# Altium PCB ESP32_USB-C.PcbDoc (part 3 of 3)
Units mil, origin at the board's own origin, x right, y up, seen from the top; angles counter-clockwise.
Board outline 2697 x 1000 mil, 4 copper layers (L1, L2, L3, L4), stack 61.583 mil thick; 64 components, 73 nets, 299 pads, 171 vias.
Unrouted connection lines stored in the file: 5.
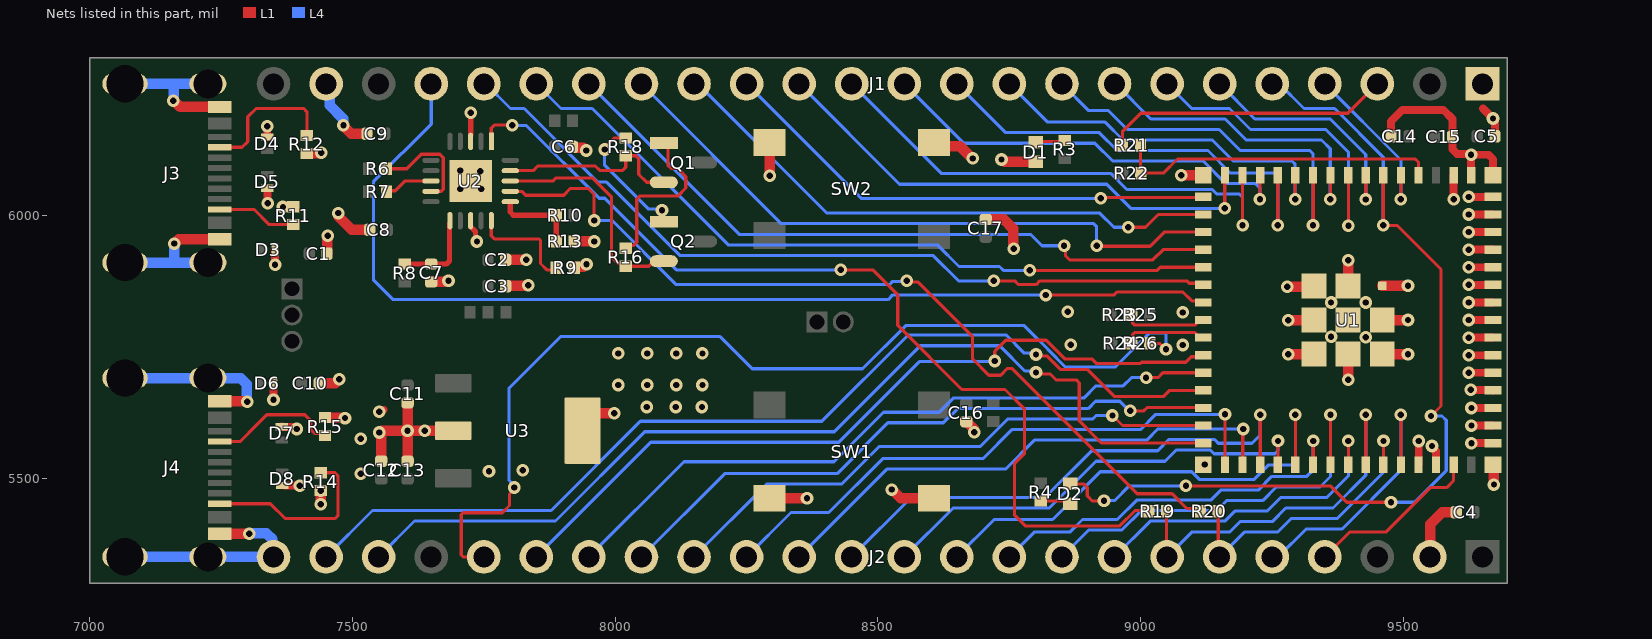
[diagram p4: the nets of this part, all layers, seen from the top]

## Via types
v1: diameter 24, hole 12, L1 to L4, tented both sides, 170 vias
v2: diameter 24, hole 12, L1 to L4, 1 vias

## Nets (pads, with @x,y where several pads share a name; then routed paths per layer and width w, separated by ;. In a path a pad name is that pad's centre, name@x,y a point inside that pad or via, vN(x,y) a via of type N, cw(c..) or ccw(c..) an arc to the next point about the centre after c; other vN are vias at no path point) (continued)
CON_ESP_USB_P: J2.20 R26.1 | length 1926.1
  L1 w6.03: J2.20@7750,5350 7710.55,5350 7707.02,5353.53 7707.02,5430.47 7710.55,5434 7785.25,5434 7799.02,5447.77 7799.02,5469.48 7808,5478.46 v1(7808,5482) ; R26.1@9017,5756 9036.17,5756 9046.98,5745.19 v1(9048,5745.19)
  L4 w6.03: v1(7808,5482) 7808,5485.53 7798.03,5495.5 7798.03,5671.03 7896,5769 8199.69,5769 8260.69,5708 8470.62,5708 8552.59,5789.97 8778.2,5789.97 8823.65,5744.53 8823.65,5744.09 8856.54,5711.2 8951.46,5711.2 9016.75,5776.48 9044.47,5776.48 9048,5772.95 v1(9048,5745.19)
CON_GPIO0: J1.3 R21.1 | length 548.6
  L1 w6: R21.1@8965.44,6133 8965.44,6159.56 8999.84,6193.97 9393.97,6193.97 J1.3@9450,6250
DTR_FTDI: Q2.2 R16.1 U2.18 | length 435.3
  L1 w6: U2.18@7800.41,6065 7800.5,6064.91 7825,6064.91 7881.27,6064.91 7887.36,6071 7956.69,6071 7993.19,6034.5 7993.19,5920.16 8004.73,5908.62 8014.37,5908.62 R16.1@8020,5902.99 8064.13,5902.99 8073.73,5912.6 Q2.2@8092.58,5912.6
ESP_USB_N: R23.2 R25.2 U1.23 | length 160.2
  L1 w6.03: R23.2@8977,5811 8984.61,5803.39 8984.61,5794.46 8988.21,5790.87 9102.55,5790.87 9106.09,5794.41 9106.09,5795.73 9110.95,5800.59 U1.23@9118.82,5800.59
ESP_USB_P: R24.2 R26.2 U1.24 | length 160.1
  L1 w6.03: R24.2@8979.01,5756 8984.61,5761.61 8984.61,5773.31 8988.15,5776.84 9102.55,5776.84 9106.09,5773.31 9106.09,5771.98 9110.95,5767.13 U1.24@9118.82,5767.13
FTDI_RESET: C7.2 R8.2 U2.11 | length 158.6
  L1 w10.01: R8.2@7600,5907.01 C7.2@7650,5907 7679.12,5907 7684.98,5912.86 7684.98,5970 U2.11@7684.98,5984.02
FTDI_USB_N: R6.2 U2.9 | length 207.6
  L1 w6.23: R6.2@7565.24,6088.58 7603.39,6088.58 7631,6116.2 7666.24,6116.2 7673.17,6109.27 7673.17,6048.96 7669.52,6045.31 U2.9@7649.59,6045.31
FTDI_USB_P: R7.2 U2.8 | length 92.9
  L1 w6.23: R7.2@7565.24,6044.29 7567.58,6046.64 7581.56,6046.64 7599.93,6065 7640,6065 U2.8@7649.59,6065
GND: C1.1 C2.1 C3.1 C4.1 C5.1 C6.1 C7.1 C8.1 C9.1 C10.1 C11.1 C12.1 C13.1 C14.1 C15.1 C16.1 C17.1 D1.1 D3.1 D4.1 D5.1 D6.1 D7.1 D8.1 J1.1 J1.23 J2.2 J2.24 J3.A1B12 J3.B1A12 J3.S1 J3.S2 J3.S3 J3.S4 J4.A1B12 J4.B1A12 J4.S1 J4.S2 J4.S3 J4.S4 R9.2 R11.1 R12.1 R13.2 R14.1 R15.1 SW1.3 SW1.4 SW2.3 SW2.4 U1.1 U1.2 U1.42 U1.43 U1.46 U1.47 U1.48 U1.49 U1.50 U1.51 U1.52 U1.53 U1.54 U1.55 U1.56 U1.57 U1.58 U1.59 U1.60 U1.61 U1.62 U1.63 U1.64 U1.65 U1.66 U1.67 U1.68 U1.69 U1.70 U1.71 U1.72 U1.73 U2.3 U2.13 U2.21 U3.2 U3.4 | length 4936.7
  L1 w10.01: U2.3@7725,6151.94 v2(7725,6195) ; U2.13@7725.23,5978.06 7730.97,5972.32 7730.97,5972.15 7734.31,5968.81 7734.31,5952.63 v1(7736.98,5949.95)
  L1 w15: D5.1@7338,6051.2 7338.5,6050.7 7338.5,6023.5 v1(7339,6023) ; D4.1@7338,6148.59 7338,6149.59 v1(7338,6169) ; v1(7350,5649) 7350.3,5649.3 D6.1@7350.3,5675.69 ; D3.1@7352.8,5934 7352.9,5933.9 7352.9,5906.1 v1(7353,5906) ; D7.1@7366,5597.72 7366.61,5597.11 7387.7,5597.11 7391.51,5593.29 v1(7393.95,5593.29) ; D8.1@7371.31,5485.5 7399.5,5485.5 v1(7400,5485) ; v1(7551.18,5625.98) 7553.62,5625.98 7557.55,5629.92 v1@7559.06,5629.92 ; U2.21@7725,6065 v1(7743.41,6083.41) ; C14.1@9476.14,6150 9476.14,6178.59 9498.05,6200.5 9575.4,6200.5 9592.87,6183.03 9592.87,6125.51 9601.66,6116.72 9626.57,6116.72 v1(9628.29,6115) ; U1.42@9528.8,5524.47 v1(9528.8,5570.53) ; v1(9554,5561) 9554,5558.56 9561.36,5551.21 9561.36,5525.22 U1.43@9561.73,5524.85 ; v1@9595.2,6030.13 U1.2@9595.2,6076.18 ; v1@9623.95,5700.2 U1.50@9670,5700.2 ; v1@9623.95,5733.66 U1.51@9670,5733.66 ; v1(9623.88,5767.06) U1.52@9670,5767.13 ; v1@9623.95,5800.59 U1.53@9670,5800.59 ; v1@9623.95,5834.06 U1.54@9670,5834.05 ; v1(9623.88,5867.46) U1.55@9670,5867.52 ; v1@9623.95,5900.98 U1.56@9670,5900.98 ; v1(9623.88,5934.39) U1.57@9670,5934.45 ; v1(9623.88,5967.85) U1.58@9670,5967.91 ; v1@9623.95,6001.38 U1.59@9670,6001.38 ; v1(9623.88,6034.78) U1.60@9670,6034.84 ; v1(9627.74,5667.88) 9628.52,5667.11 9669.63,5667.11 U1.49@9670,5666.73 ; U1.1@9628.66,6076.18 9628.29,6076.55 v1(9628.29,6115) ; v1(9629,5566.27) U1.46@9670,5566.34 ; v1@9629.03,5599.77 U1.47@9670,5599.8 ; v1(9629,5633.2) U1.48@9669.97,5633.24 ; J1.1@9650,6250 J1.1@9651,6249 ; 9651,6203 v1(9670,6184) 9670,6181.56 9673.86,6177.7 C5.1@9673.86,6150 ; U1.62@9670,6076.18 9670.36,6076.54 9670.36,6106.21 9661.57,6115 v1(9628.29,6115)
  L1 w20: v1(7159,6218) 7160.08,6218 7172.18,6205.91 J3.A1B12@7247.64,6205.91 ; v1(7161,5946) 7162.08,5946 7170.02,5953.94 J3.B1A12@7247.64,5953.94 ; J4.B1A12@7247.64,5394.09 v1(7304.09,5394.09) ; J4.A1B12@7247.64,5646.06 7298.94,5646.06 v1(7300,5645) ; v1(7367.87,6015.61) 7368.09,6015.83 7387,6015.83 R11.1@7387.22,6016.05 ; R12.1@7413.5,6117.5 7414.13,6118.13 7441,6118.13 v1(7441,6119) ; C10.1@7436.93,5680 7467,5680 v1(7475,5688) ; v1(7440,5450) v1(7440,5475.98) ; R15.1@7448,5615.01 7461,5615.01 7461.5,5614.5 7485.5,5614.5 v1(7486,5614) ; C1.1@7452,5927 7452.5,5927.5 7452.5,5960.5 v1(7453,5961) ; v1(7473,6004) 7473.77,6003.23 7473.77,5997.08 7498.56,5972.28 C8.1@7533.07,5972.28 ; v1(7483,6171) 7483,6170 7498,6155 C9.1@7528.07,6155 ; C12.1@7555,5532.56 7555,5581.71 7551.18,5585.53 v1(7551.18,5586.61) 7552.26,5586.61 7555.65,5590 v1(7605,5590) ; C13.1@7605,5531.93 v1(7605,5590) ; C11.1@7605,5643.07 v1(7605,5590) ; C7.1@7650,5873.14 7650.63,5873.77 7680.69,5873.77 7681.92,5875 v1(7683,5875) ; U3.2@7691.97,5590 v1(7637.52,5590) v1(7605,5590) ; C3.1@7791.93,5865 7791.93,5865.4 7792.56,5866.03 7833.78,5866.03 v1(7834.54,5866.8) ; C2.1@7791.93,5915 v1(7831,5915) ; C6.1@7918.94,6129.92 7918.94,6128.74 7919.57,6128.11 7938.81,6128.11 7943.92,6123 v1(7945,6123) ; R9.2@7922.01,5900 7922.01,5901.18 7922.64,5901.81 7939.47,5901.81 7944.29,5906.63 v1(7945.37,5906.63) ; R13.2@7922.01,5950 v1(7960,5950) ; U3.4@7938.03,5590 7938.03,5598.55 7962.48,5623 v1(7998,5623) ; SW1.3@8293.5,5461.42 v1(8365,5461.42) ; SW2.4@8293.5,6138.58 8293.91,6138.18 v1(8293.91,6074.91) ; v1(8526,5478) 8527.08,5478 8543.66,5461.42 SW1.4@8606.5,5461.42 ; SW2.3@8606.5,6138.58 8613.45,6131.63 8655.29,6131.63 8678.92,6108 v1(8680,6108) ; C16.1@8668,5607.07 8669.18,5607.07 8682.49,5593.76 8682.49,5587.77 v1(8683.25,5587) ; C17.1@8705,5991.93 8739.07,5991.93 8757.23,5973.77 8757.23,5936.77 v1(8758,5936) ; v1(8735,6106) 8736.08,6106 8740.78,6101.3 D1.1@8800,6101.3 ; v1(9077,6076) 9077.09,6076.09 9118.73,6076.09 U1.63@9118.82,6076.18 ; U1.64@9118.82,5525 9121,5525 v1(9121.6,5525.6) ; v1(9278.77,5863.77) 9327.67,5863.77 U1.71@9329.45,5865.55 ; v1(9280.25,5800.3) 9329.16,5800.3 U1.72@9329.45,5800.59 ; v1(9280.55,5735.63) U1.73@9329.45,5735.63 U1.73@9329.14,5735.31 ; v1(9394.41,5686.73) U1.70@9394.41,5735.63 ; U1.69@9394.41,5865.55 v1(9394.41,5914.45) ; U1.68@9459.37,5735.63 v1(9508.27,5735.63) ; U1.67@9459.37,5800.59 v1(9508.27,5800.59) ; U1.66@9459.37,5865.55 v1(9508.27,5865.55) ; J2.2@9550,5350 9550.72,5350.72 9550.72,5412 9573.72,5435 C4.1@9600,5435 ; U1.65@9670,5525 9671,5524 9671,5488.25 v1(9671.77,5487.49)
  L4 w20: J4.S4@7067.52,5350 J4.S2@7225,5350 J2.24@7350,5350 7348,5352 7348,5383.28 7336.28,5395 7319.72,5395 7319.58,5394.86 7304.86,5394.86 v1(7304.09,5394.09) ; J4.S3@7067.52,5690.16 J4.S1@7225,5690.16 7287.52,5690.16 7299.23,5678.44 7299.23,5645.77 v1(7300,5645) ; J3.S4@7067.52,5909.84 7161,5909.84 ; J3.S3@7067.52,6250 7160.93,6250 ; v1(7159,6218) 7159.77,6218.77 7159.77,6248.84 7160.93,6250 ; v1(7161,5946) 7161,5909.84 ; J3.S2@7225,5909.84 7161,5909.84 ; J3.S1@7225,6250 7160.93,6250 ; J1.23@7450,6250 7456.84,6243.16 7456.84,6209.16 7482.23,6183.77 7482.23,6171.77 v1(7483,6171)
  other v1: 7515.75,5507.87 7760,5513 7824,5515 7515.75,5574.8 9629,5599.74 8060,5635 8115,5635 8165,5635 8006,5677 8061,5677 8116,5677 8166,5677 9623.88,5700.13 9623.88,5733.6 8006,5737 8061,5737 8116,5737 8166,5737 9080,5753 8866.45,5753.66 9428,5768 9362,5769 9623.88,5800.53 9080,5815 8861,5816.34 9362,5834 9428,5834 9623.88,5833.99 9623.88,5900.92 9623.88,6001.31 9595.26,6030.06 7705,6050 7745,6050 7705,6085
GPIO0: R21.2 R22.2 U1.4 | length 620
  L1 w6: R21.2@8999.45,6133 8999.73,6132.73 8999.73,6080.27 R22.2@9000,6080 9042.82,6080 9069.74,6106.93 9522.41,6106.93 9528.27,6101.07 U1.4@9528.27,6076.18
GPIO1: J1.4 U1.5 | length 325.9
  L1 w6: v1(9494.8,6030.2) U1.5@9494.8,6076.18
  L4 w6: J1.4@9350,6250 9495,6105 9495,6030.39 v1(9494.8,6030.2)
GPIO2: D2.1 J1.5 U1.6 | length 1841.6
  L1 w6: D2.1@8866.03,5488.76 8891.24,5488.76 8898,5482 8898,5466 8908,5456 8929,5456 v1(8930,5457) ; v1(9085.83,5485) 9360.46,5485 9391.46,5454 v1(9476,5454) ; U1.6@9461.34,6076.18 v1(9461.34,5980.59) 9487.41,5980.59 9571,5897 9571,5637 v1(9552,5618)
  L4 w6: v1(8930,5457) 8950,5457 8978,5485 v1(9085.83,5485) ; J1.5@9250,6250 9263.4,6250 9310.4,6203 9368.72,6203 9461.34,6110.38 v1(9461.34,5980.59) ; v1(9476,5454) 9521,5454 9581,5514 9581,5610 9573,5618 v1(9552,5618)
GPIO3: J1.6 U1.7 | length 465.4
  L1 w6: U1.7@9427.87,6076.18 9427.94,6076.12 9427.94,6030.06 v1(9428,6030)
  L4 w6: J1.6@9150,6250 9217,6183 9360.43,6183 9428,6115.43 v1(9428,6030)
GPIO4: J1.7 U1.8 | length 635.4
  L1 w6: U1.8@9394.41,6076.18 9395,6075.59 v1(9395,5980)
  L4 w6: J1.7@9050,6250 9097,6203 9168.72,6203 9208.72,6163 9352.15,6163 9395,6120.15 v1(9395,5980)
GPIO5: J1.8 U1.9 | length 603.5
  L1 w6: v1@9361.01,6030.06 U1.9@9361.01,6076.12
  L4 w6: J1.8@8950,6250 8952.14,6250 9019.14,6183 9160.43,6183 9200.43,6143 9343.86,6143 9360.48,6126.38 v1(9360.48,6030.59)
GPIO6: J1.9 U1.10 | length 764.7
  L1 w6: v1@9328.07,5980 U1.10@9328.07,6075.59
  L4 w6: J1.9@8850,6250 8901,6199 8938.42,6199 8974.42,6163 9149,6163 9189,6123 9321.62,6123 9327.48,6117.14 v1(9327.48,5980.59)
GPIO7: J1.10 U1.11 | length 719.5
  L1 w6: v1@9293.49,6030.65 U1.11@9293.49,6076.71
  L4 w6: J1.10@8750,6250 8823,6177 8932.14,6177 8966.14,6143 9136,6143 9176,6103 9287.69,6103 9293.55,6097.14 v1(9293.55,6030.59)
GPIO8: J1.11 U1.12 | length 872.5
  L1 w6: v1(9260.55,5980.59) U1.12@9260.55,6076.18
  L4 w6: J1.11@8650,6250 8743,6157 8920.85,6157 8954.85,6123 9127.72,6123 9170.72,6080 9254.69,6080 9260.55,6074.14 v1(9260.55,5980.59)
GPIO9: J1.12 U1.13 | length 826.2
  L1 w6: v1@9226.56,6030.65 U1.13@9226.56,6076.71
  L4 w6: J1.12@8550,6250 8663,6137 8912.57,6137 8946.57,6103 9118.78,6103 9161.78,6060 9218.76,6060 9226.62,6052.14 v1(9226.62,6030.59)
GPIO10: J1.13 U1.14 | length 982.2
  L1 w6: v1(9193.62,5980.59) U1.14@9193.62,6076.18
  L4 w6: J1.13@8450,6250 8621,6079 8943.47,6079 8973.47,6049 9136,6049 9145,6040 9187.76,6040 9193.62,6034.14 v1(9193.62,5980.59)
GPIO11: J1.14 U1.15 | length 971.6
  L1 w6: U1.15@9159.63,6076.71 9159.63,6013.06 v1(9159.69,6013)
  L4 w6: J1.14@8350,6250 8541,6059 8935.18,6059 8981.18,6013 v1(9159.69,6013)
GPIO12: J1.15 U1.16 | length 960.3
  L1 w6: v1(8924,6032) 8925.42,6033.42 9117.4,6033.42 U1.16@9118.82,6034.84
  L4 w6: J1.15@8250,6250 8468,6032 v1(8924,6032)
GPIO13: J1.16 U1.17 | length 1092
  L1 w6: v1(8976,5977) 9009.01,5977 9033.39,6001.38 U1.17@9118.82,6001.38
  L4 w6: J1.16@8150,6250 8157,6250 8403,6004 8922,6004 8949,5977 v1(8976,5977)
GPIO14: J1.17 U1.18 | length 1229.1
  L1 w6: v1(8916,5942) 8917,5941 9017.78,5941 9044.7,5967.91 U1.18@9118.82,5967.91
  L4 w6: J1.17@8050,6250 8316,5984 8910.14,5984 8916,5978.14 v1(8916,5942)
GPIO15: J1.18 U1.19 | length 1325.4
  L1 w6: v1(8854,5942) 8856.68,5939.32 8856.68,5922.58 8864.25,5915 9023,5915 9042.45,5934.45 U1.19@9118.82,5934.45
  L4 w6: J1.18@7950,6250 8237,5963 8791,5963 8812,5942 v1(8854,5942)
GPIO16: J1.19 U1.20 | length 1418.3
  L1 w6: v1(8789,5895) 9031.28,5895 9037.27,5900.98 U1.20@9118.82,5900.98
  L4 w6: J1.19@7850,6250 7897,6203 7956.18,6203 8216.18,5943 8613.61,5943 8654.15,5902.46 8731.18,5902.46 8738.64,5895 v1(8789,5895)
GPIO17: J1.20 U1.21 | length 1533.3
  L1 w6: v1(8720,5875.46) 8720.34,5875.12 8760.19,5875.12 8767.31,5868 8800.89,5868 8807.89,5875 9087.28,5875 9091.89,5870.39 9115.95,5870.39 U1.21@9118.82,5867.52
  L4 w6: J1.20@7750,6250 7753.82,6250 7800.82,6203 7826.82,6203 7966.82,6063 7983.72,6063 8123.72,5923 8605.32,5923 8653.2,5875.12 8719.66,5875.12 v1(8720,5875.46)
GPIO18: J1.21 U1.22 | length 2027.7
  L1 w6: v1(8819.08,5848) 8948.43,5848 8954.43,5854 9080,5854 9097.07,5836.93 9115.95,5836.93 U1.22@9118.82,5834.05
  L4 w6: J1.21@7650,6250 7650,6173.35 7540,6063.35 7540,5877 7577.66,5839.34 8519.24,5839.34 8528.36,5848.46 8818.62,5848.46 v1(8819.08,5848)
GPIO21: J2.19 U1.25 | length 1475
  L1 w6: v1(8722.17,5722.64) 8722.09,5722.73 8722.09,5740.91 8743.17,5762 8819.93,5762 8855.26,5726.66 8906.62,5726.66 8915.28,5718.01 8999.23,5718.01 9001.42,5720.2 9085.38,5720.2 9095.97,5730.79 9115.95,5730.79 U1.25@9118.82,5733.66
  L4 w6: J2.19@7850,5350 8068,5568 8425.28,5568 8578.69,5721.41 8720.94,5721.41 v1(8722.17,5722.64)
GPIO26: J2.18 U1.26 | length 1313.9
  L1 w6: v1(9010,5691) 9032.8,5691 9042,5700.2 U1.26@9118.82,5700.2
  L4 w6: J2.18@7950,5350 8130.85,5530.85 8416.42,5530.85 8510.57,5625 8616.18,5625 8643.18,5652 8891.49,5652 8914.67,5675.19 8966.38,5675.19 8982.19,5691 v1(9010,5691)
GPIO33: J2.17 U1.28 | length 1202
  L1 w6: v1(8980,5627.78) 9005.64,5627.78 9012,5634.13 9117.95,5634.13 U1.28@9118.82,5633.27
  L4 w6: J2.17@8050,5350 8208.42,5508.42 8422.27,5508.42 8518.85,5605 8624.47,5605 8651.47,5632 8899.77,5632 8913.77,5646 8960.04,5646 8978.26,5627.78 v1(8980,5627.78)
GPIO34: J2.16 U1.29 | length 1088.2
  L1 w6: v1(8946,5619) 8965.1,5599.9 9118.72,5599.9 U1.29@9118.82,5599.8
  L4 w6: J2.16@8150,5350 8288.42,5488.42 8430.55,5488.42 8502.14,5560 8694.44,5560 8746.44,5612 8908.05,5612 8915.05,5619 v1(8946,5619)
GPIO35: J2.15 U1.31 | length 1118.4
  L1 w6: v1(9160.08,5621.05) 9160.16,5620.97 U1.31@9160.16,5525
  L4 w6: J2.15@8250,5350 8334.42,5434.42 8406.13,5434.42 8508.72,5537 8699.72,5537 8754.72,5592 8999.42,5592 9028.46,5621.05 v1(9160.08,5621.05)
GPIO36: J2.14 U1.32 | length 1014.7
  L1 w6: U1.32@9193.85,5524.77 9193.85,5592.11 v1(9195,5593.25)
  L4 w6: J2.14@8350,5350 8517,5517 8742.5,5517 8797.5,5572 9011,5572 9032.25,5593.25 v1(9195,5593.25)
GPIO37: J2.13 U1.33 | length 1013.3
  L1 w6: U1.33@9227.09,5525 v1(9227.09,5620.59)
  L4 w6: J2.13@8450,5350 8563.01,5463.01 8702.81,5463.01 8725.18,5463 8817.41,5463.01 8906.4,5552 9032,5552 9053.25,5573.25 9140.42,5573.25 9147.42,5566.25 9211.48,5566.25 9227.09,5581.86 v1(9227.09,5620.59)
GPIO38: J2.12 U1.34 | length 865.1
  L1 w6: U1.34@9261.08,5524.47 v1@9261.08,5570.53
  L4 w6: J2.12@8550,5350 8643.01,5443.01 8694.52,5443.01 ; 8694.53,5443 8733.47,5443 ; 8733.48,5443.01 8825.69,5443.01 8914.69,5532 9046,5532 9067.25,5553.25 9132.13,5553.25 9139.13,5546.25 9255.16,5546.25 9261.02,5552.11 v1(9261.02,5570.59)
GPIO39: J2.11 U1.35 | length 916.7
  L1 w6: U1.35@9294.02,5525 v1(9294.02,5620.59)
  L4 w6: J2.11@8650,5350 8721.14,5421.14 8832.11,5421.14 8922.97,5512 9097.02,5512 9112.02,5497 9215.15,5497 9243.15,5525 9288.16,5525 9294.02,5530.86 v1(9294.02,5620.59)
GPIO40: J2.10 U1.36 | length 748
  L1 w6: U1.36@9328.01,5524.47 v1@9328.01,5570.53
  L4 w6: J2.10@8750,5350 8797.04,5397.04 8797.07,5397 8865,5397 8889,5421 8955,5421 8992,5458 9133,5458 9152,5477 9223.43,5477 9249.43,5503 9316,5503 9327.95,5514.95 v1(9327.95,5570.59)
GPIO41: J2.9 U1.37 | length 787.5
  L1 w6: U1.37@9360.95,5525 v1(9360.95,5620.59)
  L4 w6: J2.9@8850,5350 8901,5401 8964,5401 9001,5438 9144,5438 9163,5457 9231.72,5457 9257.72,5483 9341,5483 9360.95,5502.95 v1(9360.95,5620.59)
GPIO42: J2.8 U1.38 | length 621.4
  L1 w6: U1.38@9394.94,5524.47 v1@9394.94,5570.53
  L4 w6: J2.8@8950,5350 9018,5418 9160,5418 9179,5437 9240,5437 9266,5463 9354,5463 9394.87,5503.87 v1(9394.87,5570.59)
GPIO45: J2.5 U1.41 | length 514.4
  L1 w6: U1.41@9494.8,5525 v1(9494.8,5620.59)
  L4 w6: J2.5@9250,5350 9261.57,5350 9314.57,5403 9383,5403 9494.8,5514.8 v1(9494.8,5620.59)
GPIO46: J2.4 U1.44 | length 335.1
  L1 w6: J2.4@9350,5350 9397.01,5397.02 9466.01,5397.02 9550.81,5481.81 9581.81,5481.81 9595.2,5495.2 U1.44@9595.2,5525
GPIO47: J2.23 U1.27 | length 1897.1
  L1 w6: v1(8800.64,5735) 8803.32,5732.32 8821.32,5732.32 8846.98,5706.66 8898.34,5706.66 8950.22,5654.78 9042.86,5654.78 9054.81,5666.73 U1.27@9118.82,5666.73
  L4 w6: J2.23@7450,5350 7538.31,5438.31 7878.2,5438.31 8047.9,5608 8393.25,5608 8557.25,5772 8744,5772 8778.32,5737.68 8797.96,5737.68 v1(8800.64,5735)
GPIO48: J2.22 U1.30 | length 1854
  L1 w6: v1(8800.61,5700.86) 8803.29,5698.18 8827.18,5698.18 8838.7,5686.66 8877.11,5686.66 8882.97,5680.81 8882.97,5608.61 8925.06,5566.52 U1.30@9118.64,5566.52
  L4 w6: J2.22@7550,5350 7618.31,5418.31 7886.49,5418.31 8056.18,5588 8417,5588 8580.64,5751.64 8731.36,5751.64 8779.46,5703.54 8797.93,5703.54 v1(8800.61,5700.86)
NetD1_2: D1.2 R3.1 | length 56.4
  L1 w6: D1.2@8800,6138.7 8801.65,6140.35 8853.35,6140.35 R3.1@8855,6142.01
NetD2_2: D2.2 R4.1 | length 58
  L1 w6: R4.1@8810,5455.99 8861.41,5455.99 D2.2@8866.03,5451.36
NetJ3_A5: J3.A5 R12.2 | length 272.1
  L1 w6: J3.A5@7247.64,6129.13 7290.13,6129.13 7301,6140 7301,6187 7317,6203 7407.65,6203 7413.5,6197.14 R12.2@7413.5,6151.51
NetJ3_B5: J3.B5 R11.2 | length 151.6
  L1 w6: J3.B5@7247.64,6011.02 7283,6011.02 7312.79,6011.02 7341.78,5982.04 R11.2@7387.22,5982.04
NetJ4_A5: J4.A5 R15.2 | length 247.8
  L1 w6: J4.A5@7247.64,5569.29 7286.29,5569.29 7319,5602 7337.29,5620.29 7409.71,5620.29 7420.95,5609.05 7420.95,5591.9 7428.1,5584.75 7444.24,5584.75 R15.2@7448,5580.99
NetJ4_B5: J4.B5 R14.2 | length 349.8
  L1 w6: J4.B5@7247.64,5451.18 7344.14,5451.18 7372.32,5423 7467.14,5423 7473,5428.86 7473,5503.52 7466.52,5510 R14.2@7440,5510
NetQ1_1: Q1.1 R16.2 | length 321.1
  L1 w6: R16.2@8020,5937.01 8025.63,5942.64 8035.14,5942.64 8041,5948.5 8041,6030.48 8046.86,6036.34 8118.91,6036.34 8134.29,6051.72 8134.29,6073.48 8123.45,6084.31 8118.91,6088.86 8106.09,6088.86 8100.23,6094.72 8100.23,6131.14 8093.97,6137.4 Q1.1@8092.58,6137.4
NetQ2_1: Q2.1 R18.2 | length 248.8
  L1 w6: v1(7980,6125) 7981,6126 7981,6129 7999.01,6147.01 R18.2@8020,6147.01 ; v1(8089,6009.34) 8089,5990.98 Q2.1@8092.58,5987.4
  L4 w6: v1(7980,6125) 7980,6095 8062.99,6012.01 8086.32,6012.01 v1(8089,6009.34)
NetR9_1: R9.1 U2.15 | length 206.6
  L1 w6: U2.15@7764.37,5989.59 7764.37,5960.86 7770.23,5955 7855,5955 7858,5952 7858,5908 7870,5896 7883.99,5896 R9.1@7887.99,5900
RTS_FTDI: Q1.2 R18.1 U2.19 | length 350.4
  L1 w6: U2.19@7811.94,6084.91 7825,6084.91 7843.91,6084.91 7852.68,6093.68 7962.29,6093.68 7970.75,6085.23 8014.14,6085.23 8020,6091.08 R18.1@8020,6112.99 8039.07,6112.99 8044.93,6107.13 8044.93,6077.47 8059.8,6062.6 Q1.2@8092.58,6062.6
RXD_FTDI: R19.2 U2.1 | length 1773.6
  L1 w6: U2.1@7764.37,6151.94 7764.37,6165.51 7770.23,6171.37 v1@7803.63,6171.37 ; v1(8429,5896) 8490,5896 8537.68,5848.32 8537.68,5790.31 8659.65,5668.34 8741.6,5668.34 8779,5630.93 8779,5546.91 8760,5527.91 8760,5428.94 8779.94,5409 8960,5409 8989.18,5438.18 9013.8,5438.18 R19.2@9014.98,5437
  L4 w6: v1(7804,6171) 7804.47,6170.53 7831,6170.53 7969.37,6032.16 7980.31,6032.16 8116.47,5896 v1(8429,5896)
TXD_FTDI: R20.2 U2.17 | length 1646.5
  L1 w6: U2.17@7800.41,6045.31 7822.69,6045.31 7825,6043 7830,6038 7902.03,6038 7915.03,6051 7948.41,6051 7960,6039.41 v1(7960,5990) ; v1(8555,5875.46) 8557.68,5872.78 8576.42,5872.78 8680.1,5769.1 8680.1,5726.53 8710.99,5695.64 8733.36,5695.64 8746.36,5708.64 8754.64,5708.64 8993.29,5470 9059.65,5470 9087.73,5441.92 9108.43,5441.92 R20.2@9113.36,5437
  L4 w6: v1(7960,5990) 7994.18,5990 8116.18,5868 8522,5868 8528,5874 8553.54,5874 v1(8555,5875.46)
U0RXD: J2.6 R20.1 U1.40 | length 572.4
  L1 w6: R20.1@9147.37,5437 9147.37,5352.63 J2.6@9150,5350 ; U1.40@9461.87,5524.47 v1@9461.87,5570.53
  L4 w6: J2.6@9150,5350 9197,5397 9260,5397 9286,5423 9374.03,5423 9461.8,5510.77 v1(9461.8,5570.59)
U0TXD: J2.7 R19.1 U1.39 | length 740.6
  L1 w6: R19.1@9048.99,5437 9048.99,5406.2 9049,5351 J2.7@9050,5350 ; U1.39@9427.87,5525 v1(9427.87,5620.59)
  L4 w6: J2.7@9050,5350 9097,5397 9168.72,5397 9188.72,5417 9250,5417 9276,5443 9365.75,5443 9427.87,5505.13 v1(9427.87,5620.59)
VBUS_SENSE: R10.1 R13.1 U2.16 | length 159.5
  L1 w10.01: U2.16@7800.41,6025.4 7800.41,6005.86 7806.28,6000 R10.1@7887.99,6000 7887.99,5995 R13.1@7887.99,5950
pads on no net: J1.24 J3.A8 J3.B8 J4.A8 J4.B8 U2.2 U2.4 U2.5 U2.6 U2.7 U2.14

## Polygon pours and split planes (outlines as drawn)
GND on L1 "NONET_L-01_P-001" (solid, remove dead copper, pour order 13): 8191,5753 8191,5514 7894,5514 7891,5517 7892,5518 7892,5564 7642,5564 7635,5564 7631,5564 7631,5520 7537,5520 7532,5520 7532,5529 7532,5652 7630,5652 7630,5632 7630,5608 7890,5608 7894,5608 7894,5753
GND on L1 "NONET_L-01_P-001" (solid, remove dead copper, pour order 11): 9526,5932 9526,5669.35 9264,5669.35 9264,5932
+5V_VBUS2 on L1 "NONET_L-01_P-001" (solid, remove dead copper, pour order 9): 7401,5779 7407.5,5770.5 7407.5,5720.5 7414,5714 7414,5666 7391,5666 7391,5702 7373,5720 7373,5745 7338,5745 7331.9,5738.9 7332,5669 7317,5669 7317,5779
+5V_VBUS1 on L1 "NONET_L-01_P-001" (solid, remove dead copper, pour order 7): 7312,5973 7312,5952 7333,5952 7333,5916 7313,5916 7312,5916 7311,5916 7311,5884 7375,5884 7375,5930 7391,5946 7430,5946 7430,5901 7446,5885 7483,5885 7483,5850 7430,5850 7430,5843.52 7307.55,5844.54 7281,5872 7281,5902 7281,5973.13
+5V on L1 "NONET_L-01_P-001" (solid, remove dead copper, pour order 6): 7405,5790 7405,5798 7565,5798 7591,5772 7591,5664 7730,5664 7730,5698 7725,5703 7706,5703 7706,5744 7737,5775 7737,5830 7712,5830 7711,5829 7711,5784 7675,5748 7675,5701 7654,5701 7654,5696 7654,5694 7654,5690 7619,5690 7619,5691 7619,5782 7576,5825 7402,5825 7402,5830 7364,5830 7364,5790
+3V3_REG on L1 "NONET_L-01_P-001" (solid, pour order 5): 7657,5509 7657,5518 7728,5518 7728,5481 7658,5481 7656,5483 7656,5489 7642,5489 7640,5487 7617,5487 7617,5458 7593,5458 7593,5486 7567,5486 7567,5458 7502,5458 7502,5482 7543,5482 7543,5509
+3V3_FTDI on L1 "NONET_L-01_P-001" (solid, pour order 3): 7606,6010 7595,5999 7581,5985 7555.51,5985 7556.53,5883.3 7587.32,5858.12 7605.49,5858.12 7614.17,5858.12 7614.17,5892.83 7580,5898.37 7580,5964 7592,5964 7626,6000 7626,6016 7644,6016 7644,5989 7632,5977 7632,5953.66 7661.66,5953.66 7662,5954 7662,6033 7615,6033 7606,6024
+3V3_FTDI on L1 "NONET_L-01_P-001" (solid, remove dead copper, pour order 1): 7897.58,6193 7897.58,6112.49 7848,6112.49 7848,6151.7 7864.53,6193
+3V3 on L1 "NONET_L-01_P-001" (solid, remove dead copper, pour order 0): 9497.48,6127 9570,6127 9570,6192 9498.5,6192
GND on L2 "NONET_L-01_P-001" (solid, pour order 16): 7010,6290 7010,5310 7013,5313 9691,5313 9691,6289 9690,6290
+3V3_REG on L2 "NONET_L-01_P-001" (solid, remove dead copper, pour order 15): 7498,5483 7615,5483 7615,5484 7615,5525.77 7643.48,5525.77 7654,5525.77 7654,5537.21 7952,5837 8401,5837 8401,5775 8401,5764 7978,5763 7701.82,5486.82 7683,5486.82 7683,5451.5 7498,5451.5
+3V3 on L2 "NONET_L-01_P-001" (solid, pour order 14): 9691,5313 9689,5313.05 9689,5384 9663,5384 9663.88,5410.59 9663.88,5446.12 9601,5509 9601,5552 9601,5800.76 9571.38,5830.38 9573,5994 9573,6235.69 9573,6286.12 9579.5,6286.34 9579.97,6290 9508,6290 9508,6202 9508,6193 9493,6193 8860,6193 8828.5,6161.5 8793,6197 7932,6197 7932,6152 8740,6152 8808,6084 8808,6048.71 8613.29,6048.71 8465.79,5901.21 8465.79,5820.5 8414.42,5820.5 8414.42,5771.21 8465.79,5771.21 8465.79,5678.21 8507.5,5636.5 8670.5,5473.5 8672,5472 8730,5472 8730,5507 8691.24,5507 8507.5,5690.74 8507.5,5870.5 8631,5994 8898,5994 8898,6084 8955,6141 9541,6141 9541,5816 9577,5780 9577,5493 9634,5436 9634,5426.28 9634,5422 9634,5406.94 9633.29,5384 9614,5384 9614,5313
GND on L3 (split plane): 9696.95,5300.05 7000.05,5300.05 7000.05,6299.95 9696.95,6299.95

## Silkscreen, mask and mechanical layers (free items; w line width, h text height)
Top Overlay:
  lines w20: 7748.03,5418.9 7748.03,5468.11 ; 7750,6131.89 7750,6181.1 ; 8248.03,5418.9 8248.03,5468.11 ; 8248.03,6131.89 8248.03,6181.1 ; 8748.03,5418.9 8748.03,5468.11 ; 8750,6131.89 8750,6181.1 ; 9248.03,5418.9 9248.03,5468.11 ; 9251.97,6131.89 9251.97,6181.1
  text "J1" at 9326,6136 h40
  text "BOOT" at 8206,6104 h40 r270
  text "POWER" at 8746,6006 h40
  text "USB1" at 7436,5836 h40
  text "UART" at 7016,5826 h40
  text "+5V" at 7436,5786 h40
  text "REG" at 8206,5776 h40
  text "+3V3" at 8526,5746 h40
  text "USB2" at 7436,5736 h40
  text "ESP" at 7016,5726 h40
  text "RESET" at 8176,5634 h40 r270
  text "USER" at 8766,5546 h40
  text "J2" at 9316,5426 h40
Bottom Overlay:
  text "NC" at 7367.23,6210.54 h40 r90
  text "GND" at 7467.23,6210.54 h40 r90
  text "+5V" at 7567.23,6210.54 h40 r90
  text "IO18" at 7667.23,6210.54 h40 r90
  text "IO17" at 7767.23,6210.54 h40 r90
  text "IO16" at 7867.23,6210.54 h40 r90
  text "IO15" at 7967.23,6210.54 h40 r90
  text "IO14" at 8067.23,6210.54 h40 r90
  text "IO13" at 8167.23,6210.54 h40 r90
  text "IO12" at 8267.23,6210.54 h40 r90
  text "IO11" at 8367.23,6210.54 h40 r90
  text "IO10" at 8467.23,6210.54 h40 r90
  text "IO9" at 8567.23,6210.54 h40 r90
  text "IO8" at 8667.23,6210.54 h40 r90
  text "IO7" at 8767.23,6210.54 h40 r90
  text "IO6" at 8867.23,6210.54 h40 r90
  text "IO5" at 8967.23,6210.54 h40 r90
  text "IO4" at 9067.23,6210.54 h40 r90
  text "IO3" at 9167.23,6210.54 h40 r90
  text "IO2" at 9267.23,6210.54 h40 r90
  text "IO1" at 9367.23,6210.54 h40 r90
  text "IO0" at 9467.23,6210.54 h40 r90
  text "3V3" at 9567.23,6210.54 h40 r90
  text "GND" at 9667.23,6210.54 h40 r90
  text "GND" at 7368.02,5533.37 h40 r90
  text "IO47" at 7468.02,5533.37 h40 r90
  text "IO48" at 7568.02,5533.37 h40 r90
  text "USB-" at 7668.02,5533.37 h40 r90
  text "USB+" at 7768.02,5533.37 h40 r90
  text "IO21" at 7868.02,5533.37 h40 r90
  text "IO26" at 7968.02,5533.37 h40 r90
  text "IO33" at 8068.02,5533.37 h40 r90
  text "IO34" at 8168.02,5533.37 h40 r90
  text "IO35" at 8268.02,5533.37 h40 r90
  text "IO36" at 8368.02,5533.37 h40 r90
  text "IO37" at 8468.02,5533.37 h40 r90
  text "IO38" at 8568.02,5533.37 h40 r90
  text "IO39" at 8668.02,5533.37 h40 r90
  text "IO40" at 8768.02,5533.37 h40 r90
  text "IO41" at 8868.02,5533.37 h40 r90
  text "IO42" at 8968.02,5533.37 h40 r90
  text "TX" at 9068.02,5533.37 h40 r90
  text "RX" at 9168.02,5533.37 h40 r90
  text "IO45" at 9268.02,5533.37 h40 r90
  text "IO46" at 9368.02,5533.37 h40 r90
  text "EN" at 9470.64,5530.74 h40 r90
  text "GND" at 9570.64,5530.74 h40 r90
  text "3V3" at 9670.64,5530.74 h40 r90
Top Solder:
  lines w20: 7000,5300 7000,6300 9700,6300 9700,5300 7000,5300

## Text inside footprints (layer, text, board x,y; h text height)
J1: Top Overlay "1" at 9627,6334 h40 r270
J2: Top Overlay "1" at 9627,5434 h40 r270
J5: Top Overlay "1" at 7311,5841 h40